# Altium PCB IDL.PcbDoc
Units mm, origin at the board's own origin, x right, y up, seen from the top; angles counter-clockwise.
Board outline 89 x 83.5 mm, 2 copper layers (Top Layer, Bottom Layer), stack 1.671 mm thick; 35 components, 24 nets, 88 pads, 0 vias.
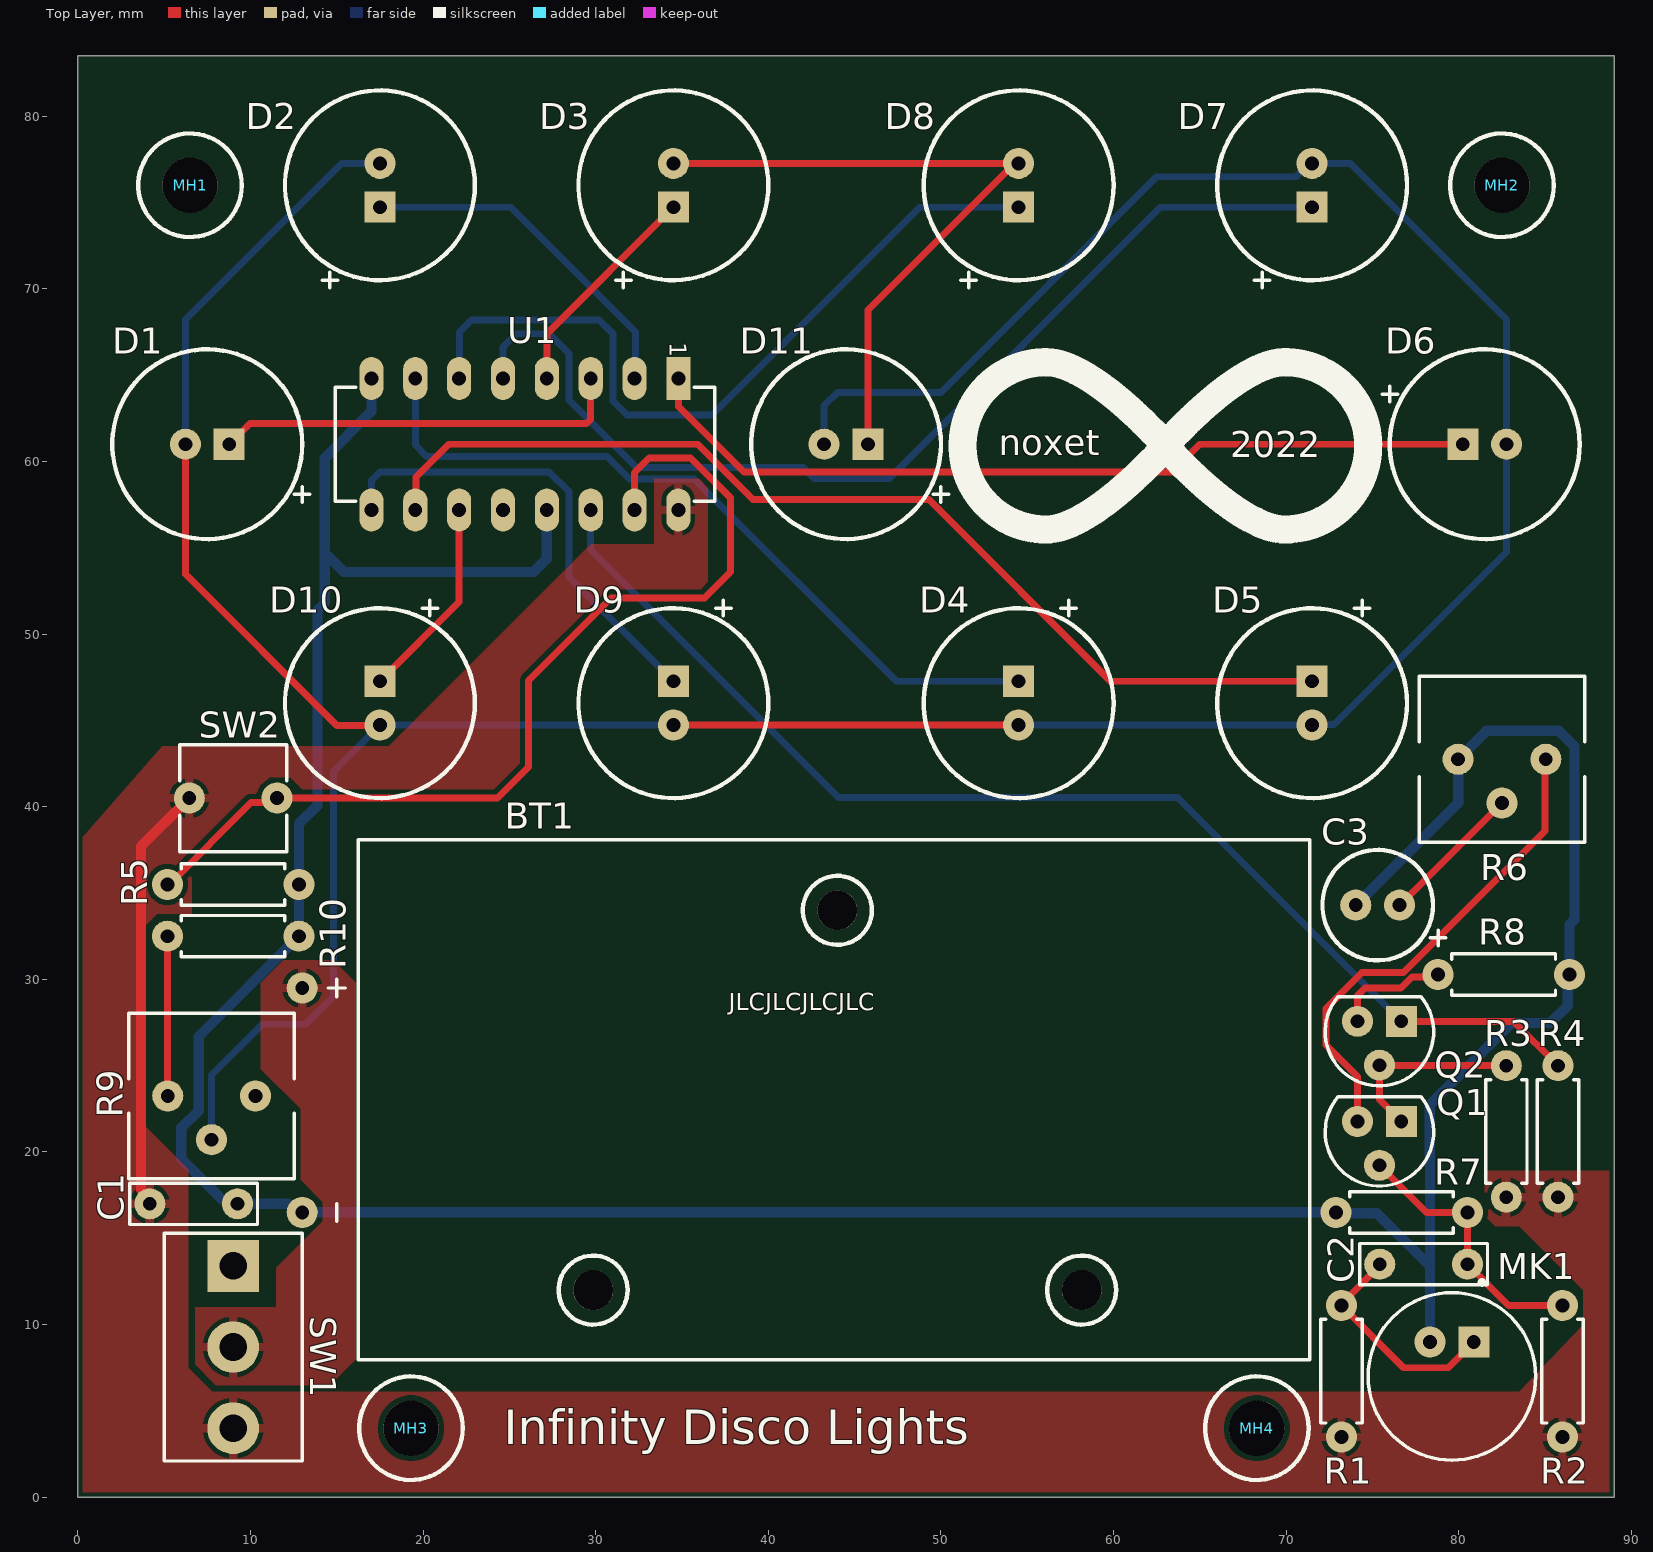
[diagram p0: Top Layer view]
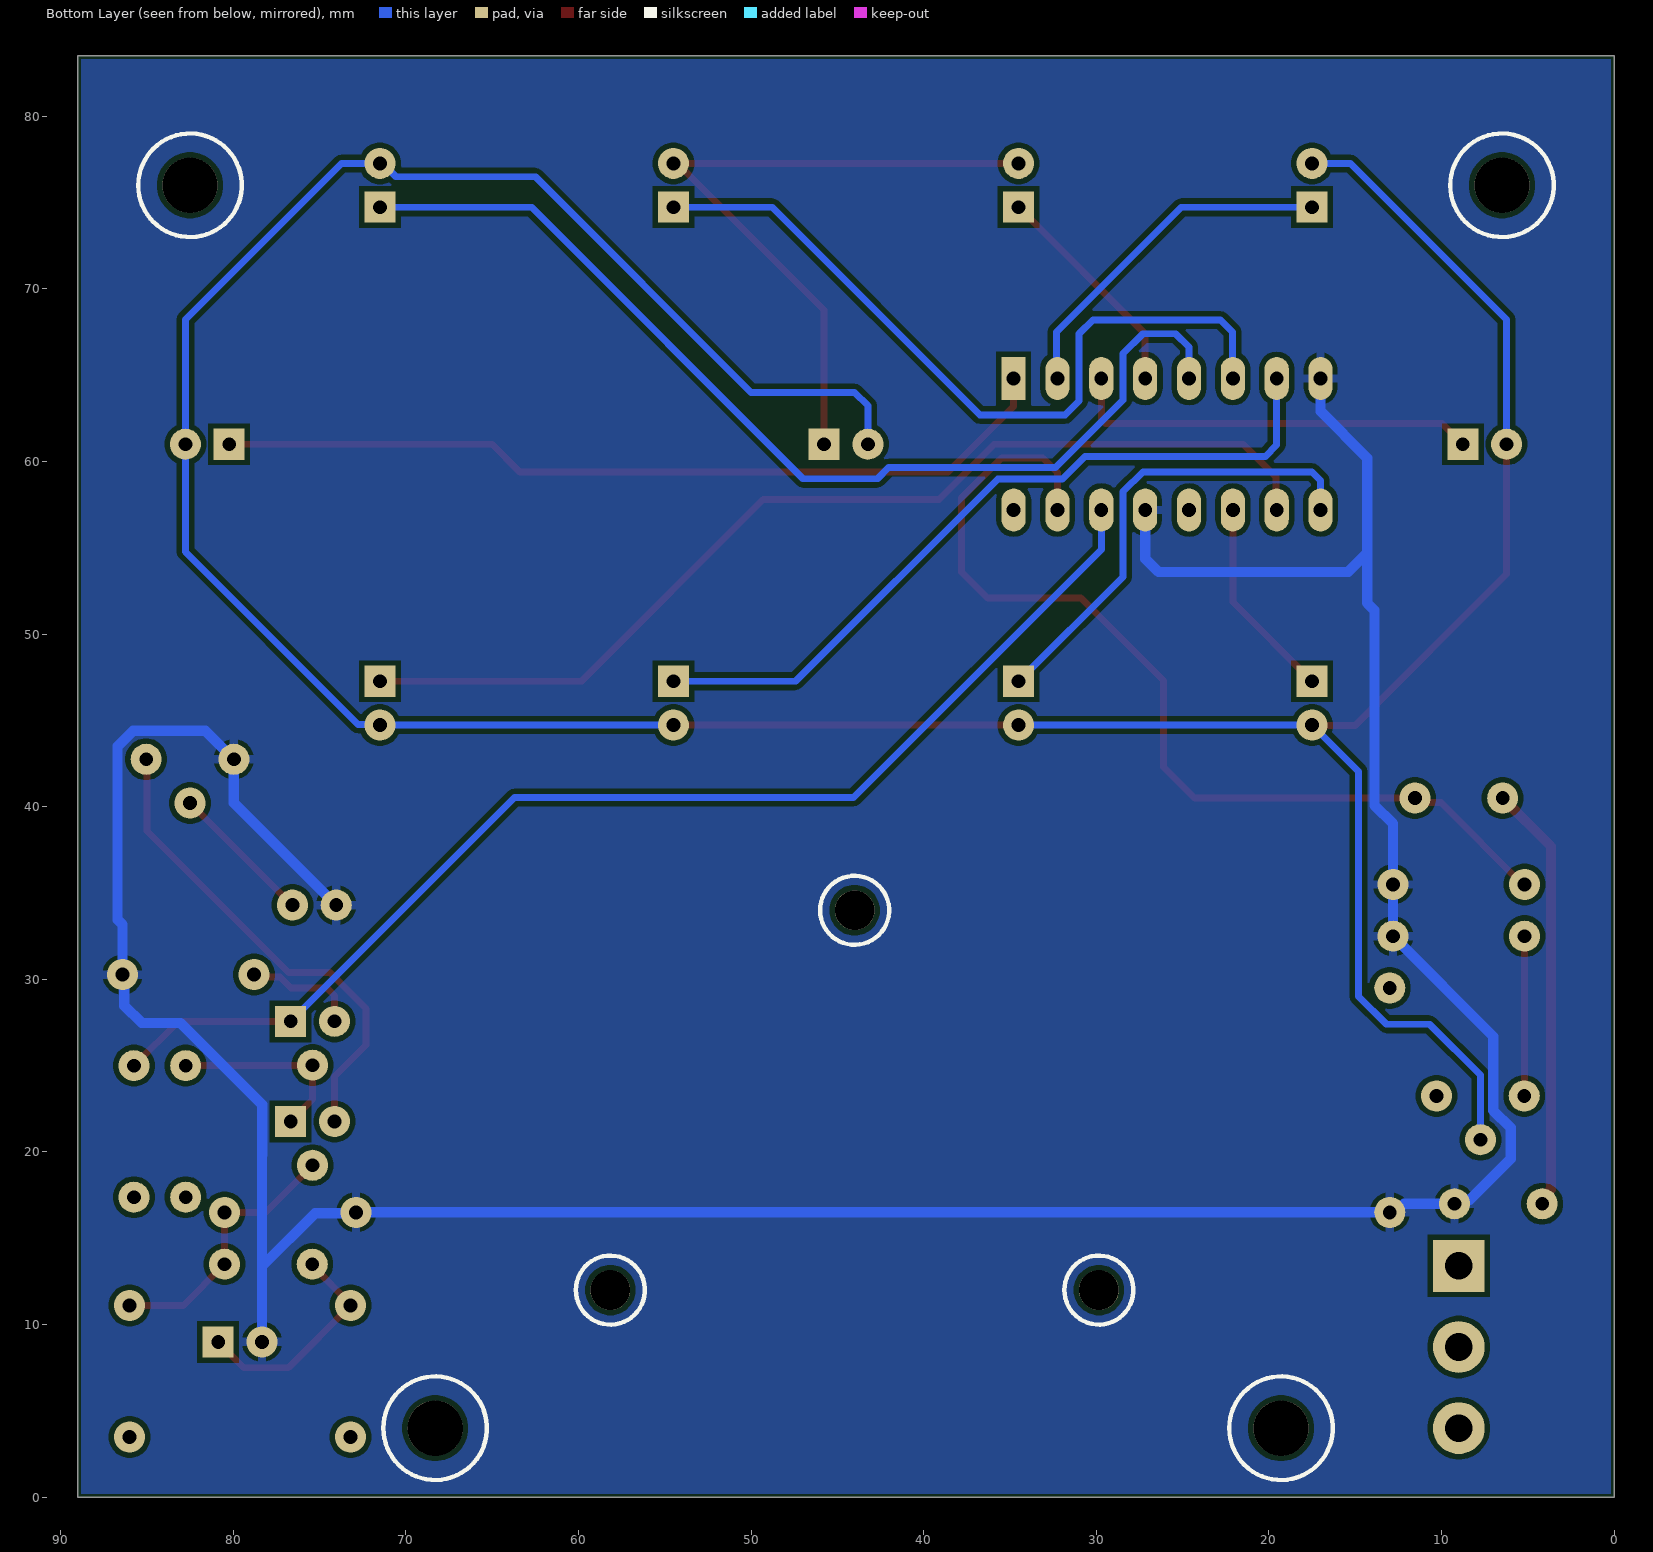
[diagram p1: Bottom Layer view, seen from below]
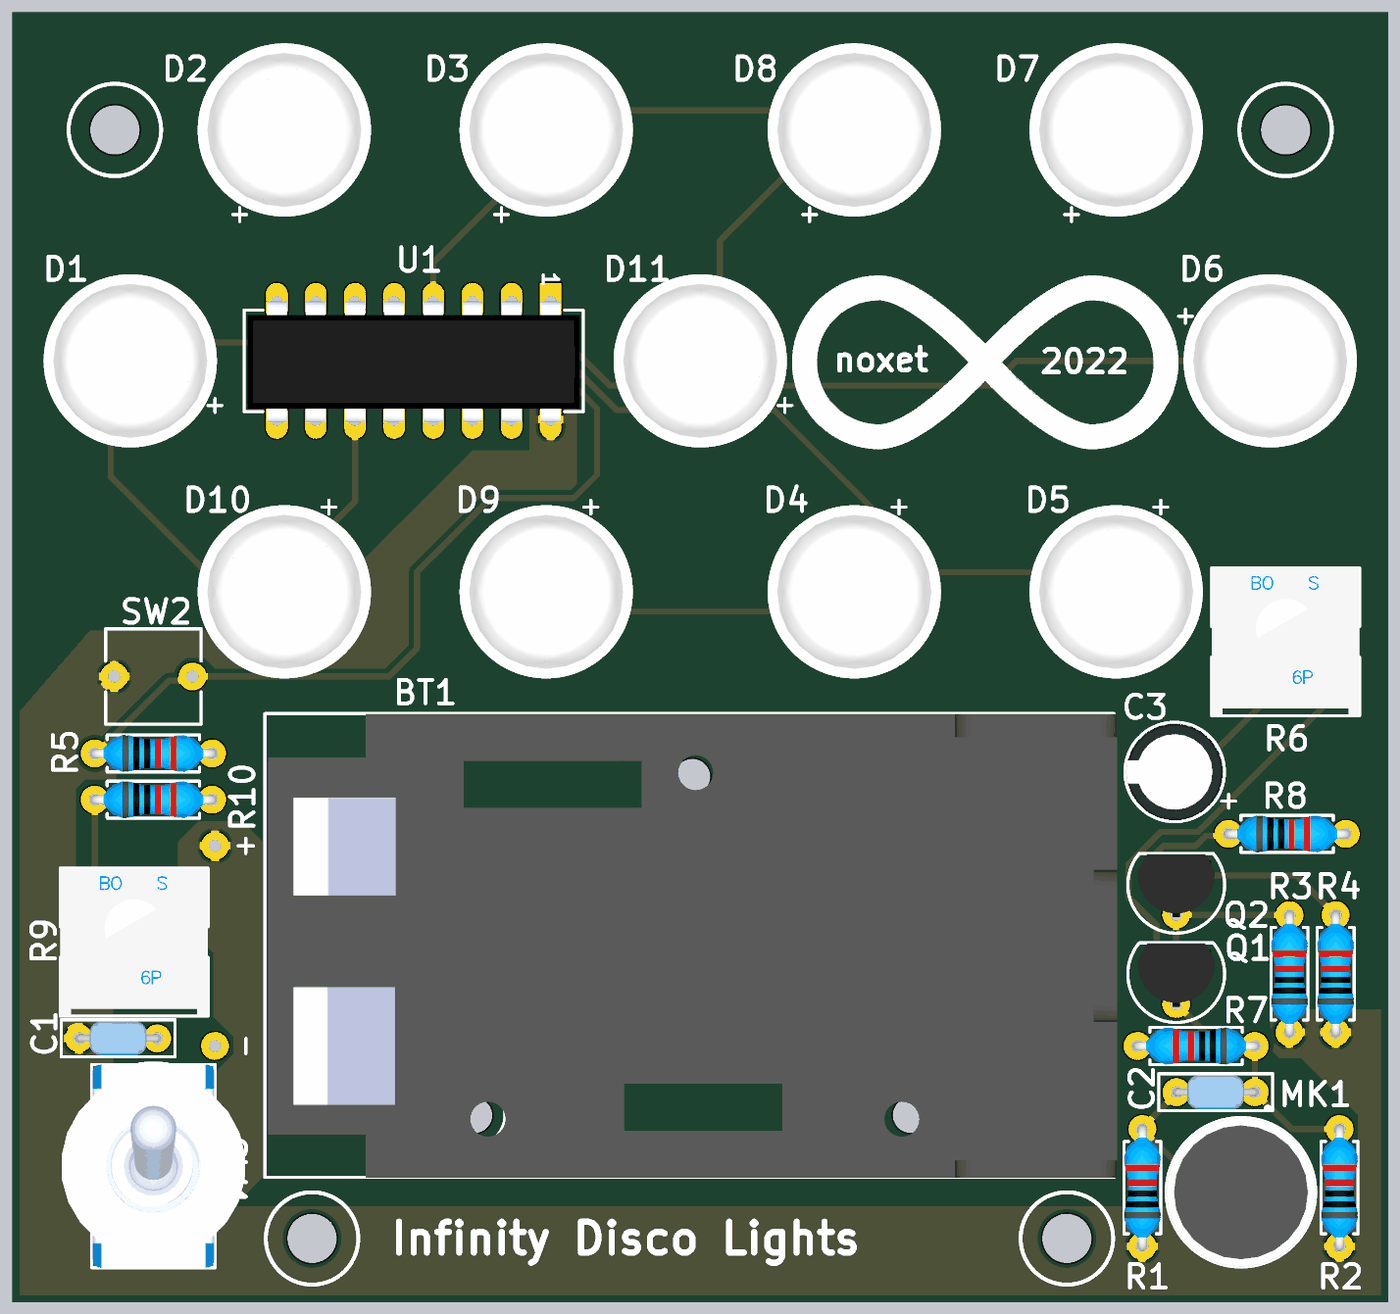
[diagram p2: 3D render of the assembled board from above, using the file's embedded part models]

## Layer stack, top to bottom
Top Solder: solder mask 0.0102, Solder Resist, Dk 3.5
Top Layer: signal copper 0.0356
Dielectric 1: dielectric 1.6, FR-4, Dk 4.8
Bottom Layer: signal copper 0.0356
Bottom Solder: solder mask 0.0102, Solder Resist, Dk 3.5

## Board outline
0,0 89,0 89,83.5 0,83.5

## Design rules (kind name [scope] priority, off if disabled: settings)
BoardOutlineClearance "BoardOutlineClearance MechDraw" [OnLayer('Mechanical Drawing')] p1: gap=0 ignorepadtopadclearanceinfootprint=FALSE
BoardOutlineClearance [All] p2: gap=0.2 ignorepadtopadclearanceinfootprint=FALSE except(0.4: Arc-SplitBarrior Arc-SplitContinuation Track-SplitBarrior Track-SplitContinuation SMDPad-SplitBarrior SMDPad-SplitContinuation THPad-SplitBarrior THPad-SplitContinuation Via-SplitBarrior Via-SplitContinuation Fill-SplitBarrior Fill-SplitContinuation Poly-SplitBarrior Poly-SplitContinuation Region-SplitBarrior Region-SplitContinuation Text-SplitBarrior Text-SplitContinuation)
Clearance Polygons [IsRegion] p1: gap=0.3 ignorepadtopadclearanceinfootprint=FALSE
Clearance "Clearance Bottom Layer" [OnLayer('Bottom Layer')] p2: gap=0.2 ignorepadtopadclearanceinfootprint=TRUE except(0.127: Arc-Arc Arc-Track Track-Track SMDPad-SMDPad; 0.254: Arc-Via Arc-Text Track-Via Track-Text SMDPad-Via SMDPad-Text THPad-Via THPad-Text Via-Via Via-Text Fill-Text Poly-Text Region-Text Text-Text; 0.33: Arc-THPad Track-THPad; 0.5: Arc-Hole Track-Hole SMDPad-THPad SMDPad-Hole THPad-THPad THPad-Hole Via-Hole Fill-Hole Poly-Hole Region-Hole Text-Hole)
Clearance "Clearance Top Layer" [OnLayer('Top Layer')] p3: gap=0.2 ignorepadtopadclearanceinfootprint=TRUE except(0.127: Arc-Arc Arc-Track Track-Track SMDPad-SMDPad; 0.254: Arc-Via Arc-Text Track-Via Track-Text SMDPad-Via SMDPad-Text THPad-Via THPad-Text Via-Via Via-Text Fill-Text Poly-Text Region-Text Text-Text; 0.33: Arc-THPad Track-THPad; 0.5: Arc-Hole Track-Hole SMDPad-THPad SMDPad-Hole THPad-THPad THPad-Hole Via-Hole Fill-Hole Poly-Hole Region-Hole Text-Hole)
Clearance [All] p4: gap=0.2 ignorepadtopadclearanceinfootprint=FALSE except(0.09: Arc-Arc Arc-Track Arc-SMDPad Track-Track Track-SMDPad SMDPad-SMDPad; 0.127: Arc-Via Track-Via SMDPad-Via THPad-Via Via-Via; 0.254: Arc-Text Track-Text SMDPad-Text THPad-Text Via-Text Fill-Text Poly-Text Region-Text Text-Text)
ComponentClearance [All] p1: gap=0.2 collisioncheckmode=3 verticalgap=0.2 showdistances=FALSE
Height [All] p1: minheight=0 maxheight=40 prefheight=12.7
HoleSize Vias [IsVia] p1: absolutevalues=TRUE maxlimit=2.54 minlimit=0.3 maxpercent=80.000 minpercent=20.000
HoleSize [All] p2: absolutevalues=TRUE maxlimit=6.35 minlimit=0.2 maxpercent=80.000 minpercent=20.000
HoleToHoleClearance [All] p1: gap=0.5 allowstackedmicrovias=TRUE
MinimumAnnularRing [All] p1: minimumring=0.3
MinimumSolderMaskSliver [All] p1: minsoldermaskwidth=0.1
PolygonConnect PolygonConnect_1 [All] p1: thpad.connectstyle=Relief thpad.reliefconductorwidth=0.508 thpad.reliefentries=4 thpad.polygonreliefangle="90 Angle" thpad.airgapwidth=0.254 smdpad.connectstyle=Relief smdpad.reliefconductorwidth=0.508 smdpad.reliefentries=4 smdpad.polygonreliefangle="90 Angle" smdpad.airgapwidth=0.254 via.connectstyle=Direct via.reliefconductorwidth=0.508 via.reliefentries=4 via.polygonreliefangle="90 Angle" via.airgapwidth=0.254
RoutingCorners [All] p1: cornerstyle=Round minsetback=2.54 maxsetback=2.54
RoutingVias [All] p1: holewidth=0.3 width=0.6 viastyle="Through Hole" minholewidth=0.3 minwidth=0.6 maxholewidth=1 maxwidth=2
SilkToSilkClearance [All] p1: silktosilkclearance=0.1
SilkToSolderMaskClearance [IsPad] p1: minsilkscreentomaskgap=0.1 clearancetoexposedcopper=TRUE
SolderMaskExpansion [All] p1: expansion=0.1 istentingtop=FALSE
Width Power [InNetClass('Power')] p1: maxlimit=2.54 minlimit=0.127 preferedwidth=0.6 minimp=50.000000 maximp=50.000000 favimp=50.000000
Width Signal [All] p2: maxlimit=2.54 minlimit=0.127 preferedwidth=0.4 minimp=50.000000 maximp=50.000000 favimp=50.000000
22 further rules are at their usual default settings.

## Components (designator, comment, footprint, x,y, rotation, side; value= is the part's Value field where it differs from the comment)
BT1 "9V" BATTERY_HOLDER_9V 44,23 r180 top locked
C1 "100n" C_CERAMIC_TH_P5.08MM 6.71,17 r180 top locked
C2 "100n" C_CERAMIC_TH_P5.08MM 77.96,13.5 r0 top
C3 "10u" C_RADIAL_D6.3MM_H6MM_P2.5MM 75.3,34.3 r180 top
D1 "Blue" LED_RADIAL_10MM 7.5,61 r180 top locked
D2 "Blue" LED_RADIAL_10MM 17.5,76 r90 top locked
D3 "Blue" LED_RADIAL_10MM 34.5,76 r90 top locked
D4 "Blue" LED_RADIAL_10MM 54.5,46 r270 top locked
D5 "Blue" LED_RADIAL_10MM 71.5,46 r270 top locked
D6 "Blue" LED_RADIAL_10MM 81.5,61 r0 top locked
D7 "Blue" LED_RADIAL_10MM 71.5,76 r90 top locked
D8 "Blue" LED_RADIAL_10MM 54.5,76 r90 top locked
D9 "Blue" LED_RADIAL_10MM 34.5,46 r270 top locked
D10 "Blue" LED_RADIAL_10MM 17.5,46 r270 top locked
D11 "Blue" LED_RADIAL_10MM 44.5,61 r180 top locked
MH1 "MH_M3_NPTH" MH_M3_NPTH 6.5,76 r0 top
MH2 "MH_M3_NPTH" MH_M3_NPTH 82.5,76 r0 top
MH3 "MH_M3_NPTH" MH_M3_NPTH 19.3,4 r0 top
MH4 "MH_M3_NPTH" MH_M3_NPTH 68.3,4 r0 top
MK1 "Electret" ELECTRETMIC_9.7MM_6.7MM 79.6,7 r90 top
Q1 "BC547B" BC547_TO-92_BENT 75.4,20.5 r270 top
Q2 "BC547B" BC547_TO-92_BENT 75.4,26.3 r270 top
R1 "10k" R_AXIAL_7.62MM 73.2,7.3 r270 top
R2 "100k" R_AXIAL_7.62MM 86,7.3 r270 top
R3 "33k" R_AXIAL_7.62MM 82.75,21.19 r270 top
R4 "22k" R_AXIAL_7.62MM 85.75,21.19 r270 top
R5 "4.7k" R_AXIAL_7.62MM 9,35.5 r180 top locked
R6 "1k" TRIMPOT_TH_P5.08MM 82.5,42.75 r0 top
R7 "10k" R_AXIAL_7.62MM 76.69,16.5 r0 top
R8 "5.6k" R_AXIAL_7.62MM 82.6,30.275 r180 top
R9 "500R" TRIMPOT_TH_P5.08MM 7.75,23.25 r0 top locked
R10 "100R" R_AXIAL_7.62MM 9,32.5 r180 top locked
SW1 "SPDT" SW_SPDT_SMTS-102-A2 9,8.7 r0 top locked
SW2 "Switch" SW_TACTILE_2PIN_P5.08MM 9,40.5 r180 top locked
U1 "CD4017B" DIP16_W7.62MM_P2.54MM 25.9,61 r270 top locked

## Footprints (in the part's own frame and the unit in brackets; to place one, negate y for a bottom-side part, rotate by r counter-clockwise, add the part's x,y. Pads: shape width x height; smd on the part's side, far side on the other; paste and mask are expansions set on the pad)
BATTERY_HOLDER_9V [mm]
  round 1.8 hole 0.8: N(31,6.5) P(31,-6.5)
  round 2.3 hole 2.3 unplated: ""(-14.15,11) ""(0,-11) ""(14.15,11)
  silkscreen extent -27.36,-15.09 29.5,15.04, body extent -27.56,-15.06 27.56,15.06, height 21.46
BC547_TO-92_BENT [mm]
  rect 1.8x1.8 hole 0.8: 1(-1.27,1.27)
  round 1.8 hole 0.8: 2(1.27,0) 3(-1.27,-1.27)
  silkscreen extent -2.7,-3.14 2.47,3.14, body extent -2.67,-2.5 1.44,2.5, height 9.5
C_CERAMIC_TH_P5.08MM [mm]
  round 1.8 hole 0.8: 1(-2.54,0) 2(2.54,0)
  silkscreen extent -3.7,-1.2 3.7,1.2, body extent -2.79,-1.11 2.79,1.1, height 6
C_RADIAL_D6.3MM_H6MM_P2.5MM [mm]
  round 1.8 hole 0.8: 1(-1.27,0) 2(1.27,0)
  silkscreen extent -3.95,-3.2 3.2,3.2, body extent -3.15,-3.15 3.15,3.15, height 1.9
DIP16_W7.62MM_P2.54MM [mm]
  rect 2.5x1.4 hole 0.8: 1(-3.81,8.89)
  oval 2.5x1.4 hole 0.8: 2(-3.81,6.35) 3(-3.81,3.81) 4(-3.81,1.27) 5(-3.81,-1.27) 6(-3.81,-3.81) 7(-3.81,-6.35) 8(-3.81,-8.89) 9(3.81,-8.89) 10(3.81,-6.35) 11(3.81,-3.81) 12(3.81,-1.27) 13(3.81,1.27) 14(3.81,3.81) 15(3.81,6.35) 16(3.81,8.89)
  silkscreen extent -3.3,-11 3.3,11, body extent -3.87,-10.79 4,10.8, height 4.19
ELECTRETMIC_9.7MM_6.7MM [mm]
  rect 1.8x1.8 hole 0.8: 1(2,-1.27)
  round 1.8 hole 0.8: 2(2,1.27)
  silkscreen extent -4.85,-4.85 5.54,4.85, body extent -4.85,-4.85 4.85,4.85, height 4.71
LED_RADIAL_10MM [mm]
  rect 1.8x1.8 hole 0.8: 1(-1.27,0)
  round 1.8 hole 0.8: 2(1.27,0)
  silkscreen extent -5.95,-5.5 5.5,5.5, body extent -5.5,-5.5 5.5,5.5, height 14.01
MH_M3_NPTH [mm]
  round 3.2 hole 3.2 unplated: 1(0,0)
  silkscreen extent -3,-3 3,3
R_AXIAL_7.62MM [mm]
  round 1.8 hole 0.8: 1(-3.81,0) 2(3.81,0)
  silkscreen extent -3,-1.2 3,1.2, body extent -4.11,-1.2 4.11,1.2, height 2.7
SW_SPDT_SMTS-102-A2 [mm]
  rect 3x3 hole 1.6: 1(0,4.7)
  round 3 hole 1.6: 2(0,0) 3(0,-4.7)
  silkscreen extent -4,-6.6 4,6.6, body extent -6,-6.6 6,6.79, height 30.13
SW_TACTILE_2PIN_P5.08MM [mm]
  round 1.8 hole 0.8: 1(-2.54,0) 2(2.54,0)
  silkscreen extent -3.1,-3.1 3.1,3.1, body extent -3.1,-3.1 3.1,3.1, height 5.4
TRIMPOT_TH_P5.08MM [mm]
  round 1.8 hole 0.8: 1(-2.54,0) 2(0,-2.54) 3(2.54,0)
  silkscreen extent -4.8,-4.8 4.8,4.8, body extent -4.8,-4.78 4.8,4.82, height 5.02

## Part data
BT1: library part "Battery Holder 9v", "Electrokit art nr: 41003388"
C1 C2: library part "Cap Ceramic"
C3: library part "Cap TH Polarized", "D6.3mm H6mm P2.5mm"
D1 D2 D3 D4 D5 D6 D7 D8 D9 D10 D11: library part "LED, TH"
MK1: library part "Electret Mic", "D9.7mm H6.7mm, Electrokit art nr: 40290007"
Q1 Q2: library part "BJT NPN", "BJT NPN in CBE  configuration"
R1 R2 R3 R4 R5 R7 R8 R10: library part "Resistor TH", "Axial P7.62mm"
R6 R9: library part "Pot TH", "Trimpot TH 3386P"
SW1: library part "Toggle switch SPDT", "Toggle switch SPDT"
SW2: library part "Tactile switch 2 pin", "2-pin tactile button switch"
U1: "Decade counter"

## Nets (pads, with @x,y where several pads share a name; then routed paths per layer and width w, separated by ;. In a path a pad name is that pad's centre, name@x,y a point inside that pad or via, vN(x,y) a via of type N, cw(c..) or ccw(c..) an arc to the next point about the centre after c; other vN are vias at no path point)
+9V: C1.2 R1.2 R2.2 R3.2 R4.2 SW1.3 SW2.2 U1.16 | length 25
  Top Layer w0.6: C1.2 4.17,17.325 3.66,17.835 3.66,37.7 SW2.2
  Bottom Layer w0.6: C1.2@4.051,17 C1.2
GND: BT1.N C1.1 C3.2 MK1.2 R5.1 R6.1 R7.1 R8.1 R10.1 U1.8 U1.13 | length 199.5
  Top Layer w0.4: R7.1 R7.1@72.925,16.455
  Top Layer w0.6: BT1.N@12.675,16.5 BT1.N
  Bottom Layer w0.6: U1.8 17.01,62.91 14.3,60.2 14.3,54.7 ; U1.13 27.17,54.37 26.4,53.6 15.4,53.6 14.3,54.7 ; R7.1 BT1.N 12.675,16.5 12.175,17 C1.1 9.02,17.23 8.37,17.23 6,19.6 6,21.4 7,22.4 7,26.69 R10.1 R5.1 12.81,39.01 13.888,40.088 13.888,51.388 14.3,51.8 14.3,54.7 ; R7.1@72.925,16.455 75.245,16.455 78.33,13.37 ; C3.2 79.96,40.23 R6.1 81.61,44.4 85.8,44.4 86.7,43.5 86.7,33.45 86.41,33.16 R8.1 86.3,30.165 86.3,28.475 85.3,27.475 83.061,27.475 78.325,22.739 78.325,19.825 78.33,19.82 78.33,13.37 ; MK1.2 78.33,13.37
NetBT1_P: BT1.P SW1.2
NetC2_1: C2.1 MK1.1 R1.1 | length 13.1
  Top Layer w0.4: C2.1 75.42,13.415 73.2,11.195 R1.1 76.81,7.5 79.37,7.5 MK1.1
NetC2_2: C2.2 Q1.2 R2.1 R7.2 | length 15.7
  Top Layer w0.4: Q1.2 78.13,16.5 R7.2 C2.2 82.89,11.11 R2.1
NetC3_1: C3.1 R6.2 | length 8.4
  Top Layer w0.4: C3.1 76.58,34.3 82.49,40.21 R6.2
NetD1_1: D1.1 U1.3 | length 23.9
  Top Layer w0.4: D1.1 9.97,62.2 29.466,62.2 29.7,62.434 29.7,64.8 U1.3
NetD1_2: D1.2 D2.2 D4.2 D5.2 D6.2 D7.2 D9.2 D10.2 D11.2 R9.2 | length 208.4
  Top Layer w0.4: D1.2 6.23,53.47 15,44.7 17.47,44.7 D10.2 ; D9.2 D4.2
  Bottom Layer w0.4: D1.2 6.23,68.23 15.27,77.27 D2.2 ; R9.2 7.75,24.45 10.7,27.4 13.2,27.4 14.807,29.007 14.807,42.037 D10.2 D9.2 ; D11.2 43.23,63.23 44,64 50,64 62.495,76.495 70.566,76.495 71.341,77.27 73.73,77.27 82.77,68.23 D6.2 82.77,54.77 72.766,44.766 71.536,44.766 D5.2 D4.2
NetD2_1: D2.1 U1.2 | length 20.5
  Bottom Layer w0.4: D2.1 25.07,74.73 32.3,67.5 32.3,64.86 U1.2
NetD3_1: D3.1 U1.4 | length 13
  Top Layer w0.4: U1.4 27.17,67.4 D3.1
NetD3_2: D3.2 D8.2 D11.1 | length 39.8
  Top Layer w0.4: D3.2 D8.2@54.27,77.27 ; D11.1 45.77,68.77 D8.2@54.27,77.27 ; D8.2 D8.2@54.27,77.27
NetD4_1: D4.1 U1.7 | length 44.5
  Bottom Layer w0.4: U1.7 19.55,60.95 20.2,60.3 30.646,60.3 31.954,58.992 35.708,58.992 47.43,47.27 D4.1
NetD5_1: D5.1 U1.10 | length 60.3
  Top Layer w0.4: U1.10 19.6,57.24 19.6,59.1 21.5,61 35.9,61 39.1,57.8 49.296,57.8 59.826,47.27 D5.1
NetD6_1: D6.1 U1.1 | length 49.3
  Top Layer w0.4: U1.1 34.806,64.794 34.806,63.194 38.6,59.4 63.4,59.4 65,61 D6.1
NetD7_1: D7.1 U1.5 | length 60.6
  Bottom Layer w0.4: U1.5 24.63,66.63 25.4,67.4 27.3,67.4 28.45,66.25 28.45,63.55 32.354,59.646 42.034,59.646 42.68,59 47,59 62.73,74.73 D7.1
NetD8_1: D8.1 U1.6 | length 44.9
  Bottom Layer w0.4: U1.6 22.1,64.82 22.1,67.5 22.8,68.2 30.2,68.2 31,67.4 31,63.5 31.8,62.7 36.749,62.7 48.779,74.73 D8.1
NetD9_1: D9.1 U1.9 | length 27.3
  Bottom Layer w0.4: U1.9 17.01,58.91 17.5,59.4 27.3,59.4 28.45,58.25 28.45,53.32 D9.1
NetD10_1: D10.1 U1.11 | length 11.8
  Top Layer w0.4: D10.1 22.09,51.86 U1.11
NetQ1_1: Q1.1 Q2.2 R3.1 | length 11.1
  Top Layer w0.4: Q1.1 75.4,23.04 Q2.2 75.415,25.015 82.735,25.015 R3.1
NetQ1_3: Q1.3 R6.3 | length 28.4
  Top Layer w0.4: Q1.3 74.13,24.359 72.3,26.189 72.3,28.316 74.384,30.4 76.8,30.4 85,38.6 85,42.71 R6.3
NetQ2_1: Q2.1 R4.1 U1.14 | length 70.7
  Top Layer w0.4: Q2.1 83.18,27.57 R4.1
  Bottom Layer w0.4: U1.14 29.71,54.89 44.065,40.535 63.705,40.535 Q2.1
NetQ2_3: Q2.3 R8.2 | length 6.7
  Top Layer w0.4: Q2.3 74.13,29.055 74.575,29.5 76.645,29.5 77.29,30.145 78.66,30.145 R8.2
NetR5_2: R5.2 SW2.1 U1.15 | length 56.4
  Top Layer w0.4: R5.2 5.3,35.5 10.04,40.24 11.28,40.24 SW2.1 24.3,40.5 26.1,42.3 26.1,47.3 30.9,52.1 36.3,52.1 37.8,53.6 37.8,57.9 35.5,60.2 33.1,60.2 32.25,59.35 U1.15
NetR9_1: R9.1 R10.2 | length 9.3
  Top Layer w0.4: R10.2 5.2,32.49 5.2,23.26 R9.1
pads on no net: BT1. MH1.1 MH2.1 MH3.1 MH4.1 R9.3 SW1.1 U1.12

## Polygon pours and split planes (outlines as drawn)
+9V on Top Layer "+9V_L01_P000" (solid, remove dead copper, pour order 0): 81.5,18.9 88.7,18.9 88.7,0.3 0.3,0.3 0.3,38.22 4.883,43.5 18,43.5 29.7,55.2 33.4,55.2 33.4,58.992 36.5,58.992 36.5,52.5 30.944,52.5 29.467,50.767 26.1,47.4 25.777,41 13,41 12.3,41.7 11.1,41.7 6.6,36.4 6.6,33.8 4.6,33.8 3.8,33 3.8,21.6 6.4,19 6.4,7.5 7.8,6.1 83.5,6.1 87.2,10 87.2,12 83.5,15.7 82.1,15.7 81.5,16.3
NetBT1_P on Top Layer "NETBT1_P_L01_P001" (solid, remove dead copper, pour order 1): 6.8,11 6.8,7.7 8,6.5 14.6,6.5 16.1,8 16.1,29.8 14.8,31.1 11.9,31.1 10.6,29.8 10.6,24.8 12.9,22.5 12.9,18.4 14.2,17.1 14.2,16 11.5,13.3 11.5,11
GND on Bottom Layer "GND_L02_P002" (solid, remove dead copper, pour order 2): 0,83.5 89,83.5 89,0 0,0

## Silkscreen, mask and mechanical layers (free items; w line width, h text height)
Top Overlay:
  region: 5921 vertices and 2 holes, not listed, extent 50.458,55.262 75.55,66.555
  text "noxet" at 53.351,60.375 h1.5
  text "2022" at 66.751,60.25 h1.5
  text "JLCJLCJLCJLC" at 37.7,28.2 h1
  text "Infinity Disco Lights" at 24.673,3.066 h2
Board outline:
  the board outline again, w0.3
Mechanical Drawing:
  circle w1: c82.5,76 r1.6
  circle w1: c6.5,76 r1.6
  circle w1: c19.3,4 r1.6
  circle w1: c68.3,4 r1.6
  lines w1: 0,0 0,83.5 89,83.5 89,0 0,0
  text "Mechanical Drawing" at -7.483,110.001 h6
  text "Units: mm" at -14.6,-11.1 h2

## Dimensions
82.5,76 to 89,83.5 on Mechanical Drawing
68.3,4 to 89,0 on Mechanical Drawing
6.5,76 to 0,83.5 on Mechanical Drawing
82.5,76 to 89,83.5 on Mechanical Drawing
68.3,4 to 89,0 on Mechanical Drawing
0,0 to 19.3,4 on Mechanical Drawing
0,83.5 to 89,83.5 on Mechanical Drawing
0,0 to 0,83.5 on Mechanical Drawing

## Text inside footprints (layer, text, board x,y; h text height)
U1: Top Overlay "1" at 34.3,66.9 h1 r270